# Altium PCB MAX232.PcbDoc
Units mm, origin at the board's own origin, x right, y up, seen from the top; angles counter-clockwise.
Board outline 20 x 20 mm, 2 copper layers (Top Layer, Bottom Layer); 9 components, 13 nets, 34 pads, 15 vias.
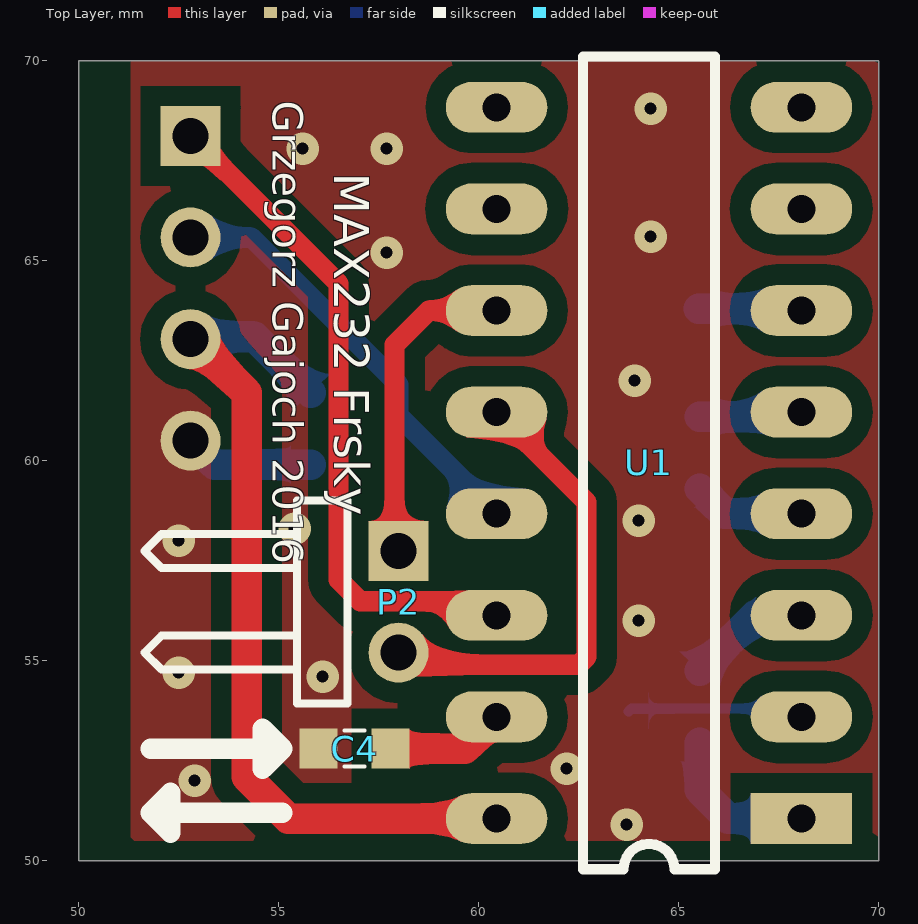
[diagram p0: Top Layer view]
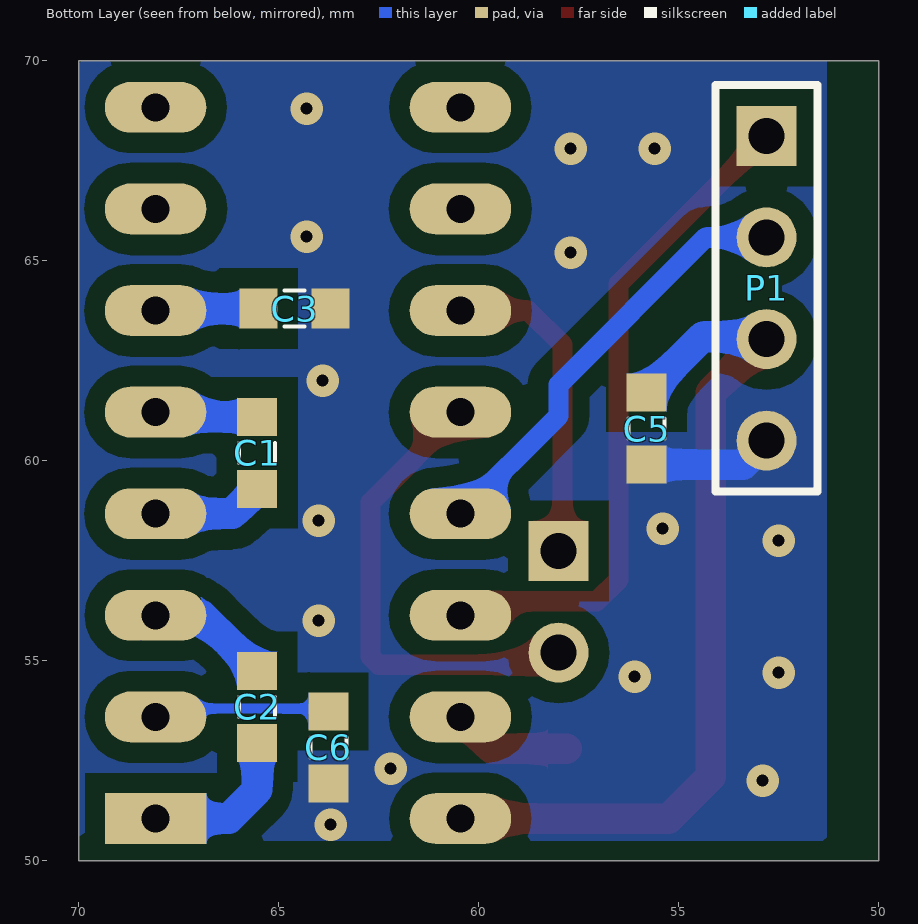
[diagram p1: Bottom Layer view, seen from below]
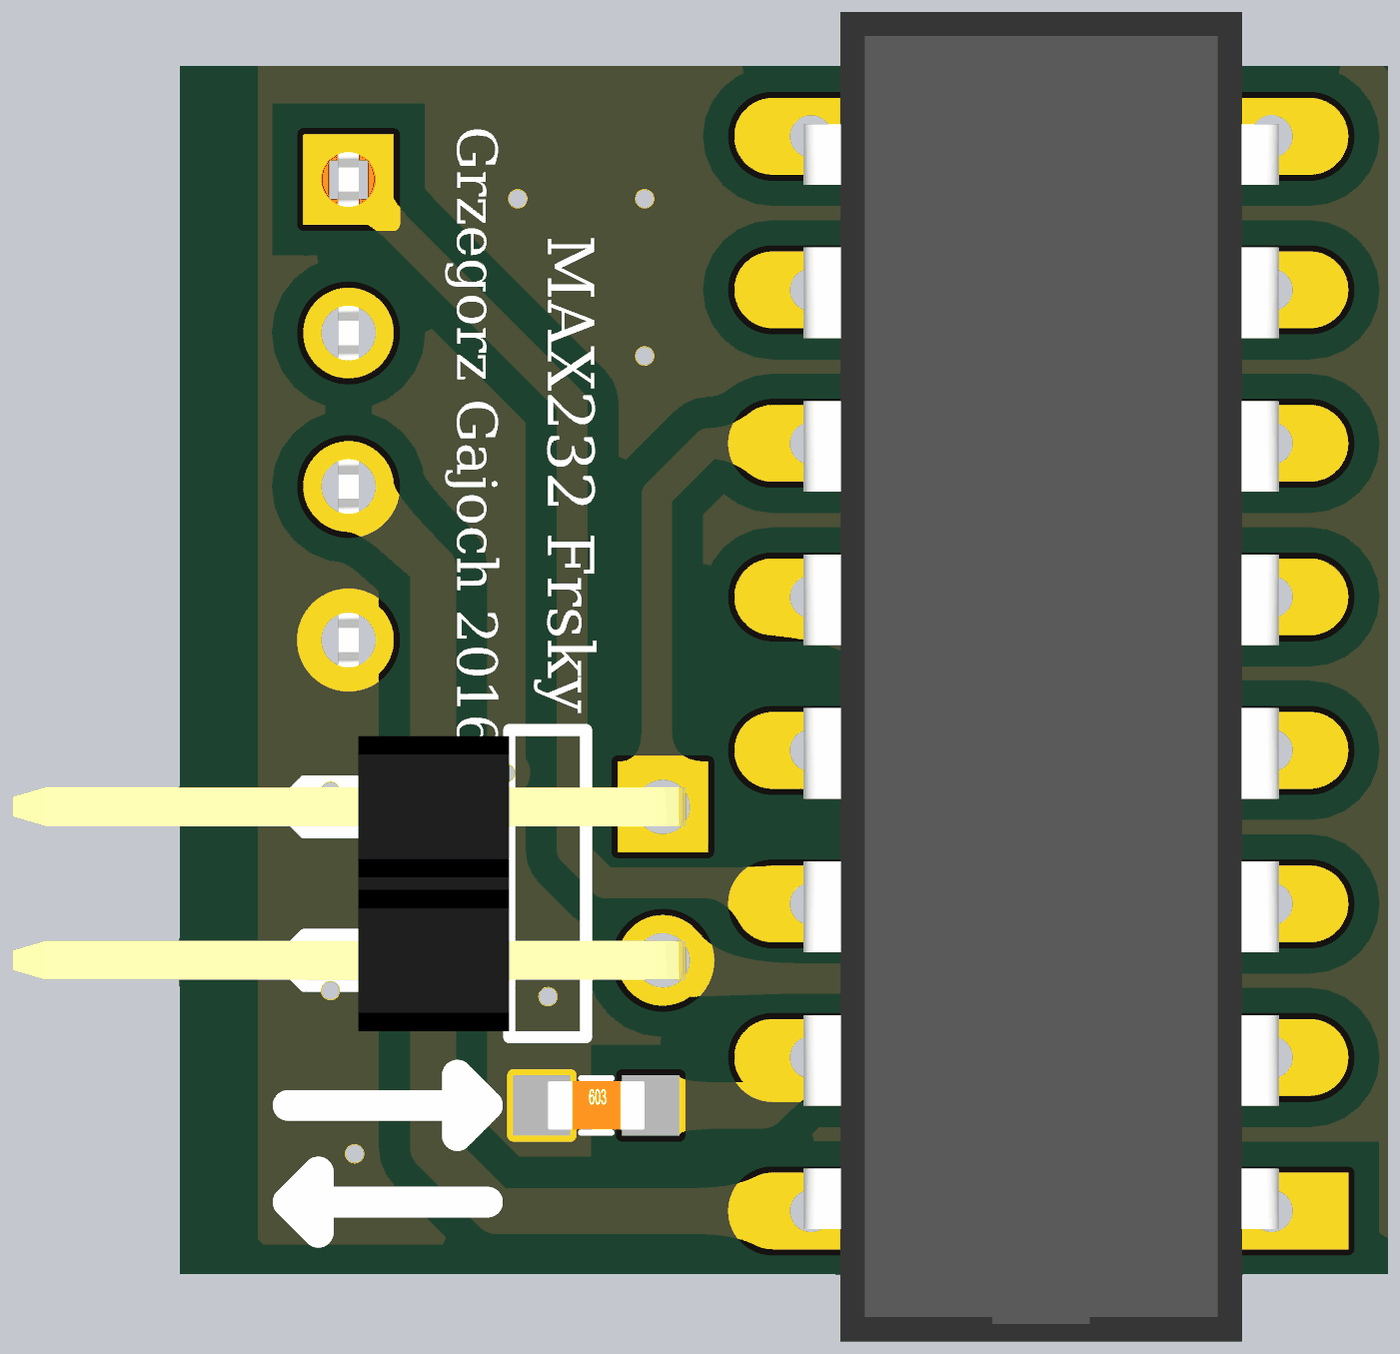
[diagram p2: 3D render of the assembled board from above, using the file's embedded part models]
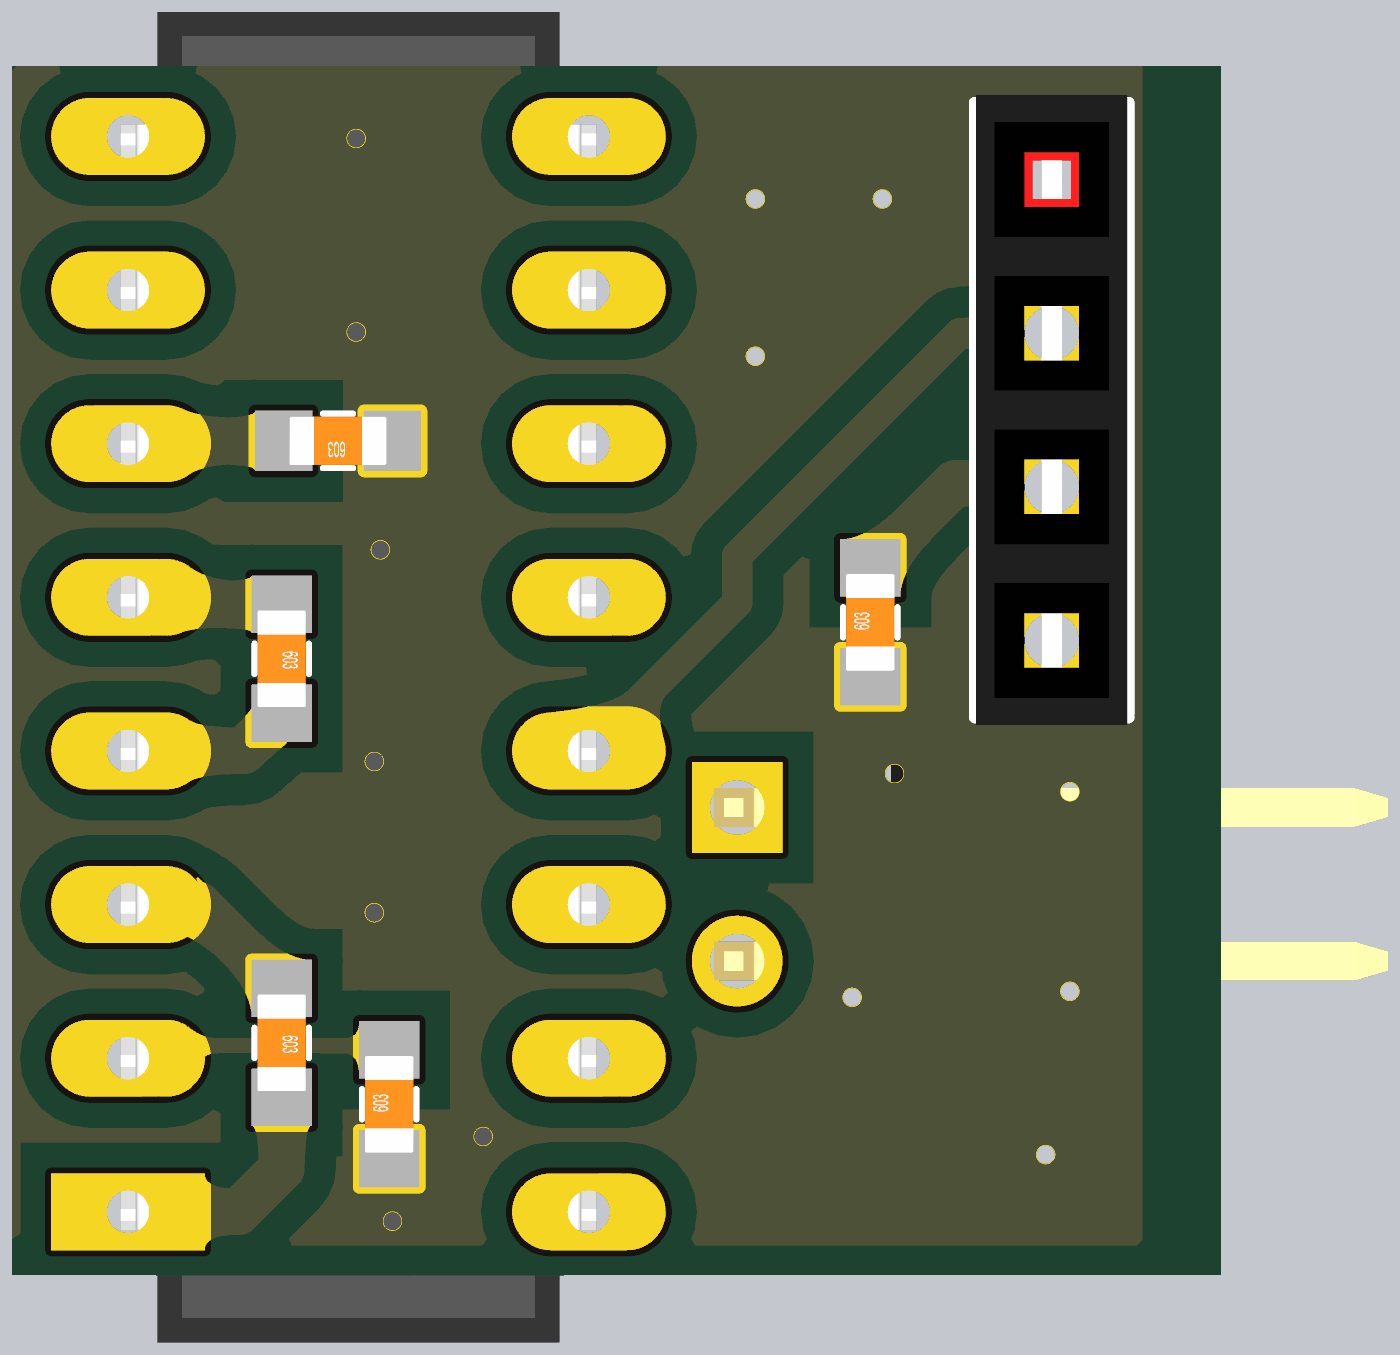
[diagram p3: 3D render of the assembled board from below, using the file's embedded part models]

## Layer stack, top to bottom
Top Solder: solder mask 0.0102, Solder Resist, Dk 3.5
Top Layer: signal copper 0.0356
Dielectric 1: dielectric 0.32, FR-4, Dk 4.8
Bottom Layer: signal copper 0.0356
Bottom Solder: solder mask 0.0102, Solder Resist, Dk 3.5

## Board outline
50,50 50,70 70,70 70,50

## Design rules (kind name [scope] priority, off if disabled: settings)
Clearance [All] p1: gap=0.254 except(0.508: Arc-Poly Track-Poly SMDPad-Poly THPad-Poly Via-Poly Fill-Poly Poly-Poly Poly-Region Poly-Text)
MinimumSolderMaskSliver [All] p1: minsoldermaskwidth=0.076
PolygonConnect [All] p1: connectstyle=Direct reliefconductorwidth=0.254 reliefentries=4 polygonreliefangle="90 Angle" airgapwidth=0.254
RoutingVias [All] p1: holewidth=0.711 width=1.27 viastyle="Through Hole" minholewidth=0.711 minwidth=1.27 maxholewidth=0.711 maxwidth=1.27
SilkToSolderMaskClearance [IsPad] p1: minsilkscreentomaskgap=0.025 clearancetoexposedcopper=TRUE
SolderMaskExpansion [All] p1: expansion=0.102
Width [All] p1: maxlimit=2.54 minlimit=0.254 preferedwidth=0.254 minimp=50.000000 maximp=50.000000 favimp=50.000000
28 further rules are at their usual default settings.

## Components (designator, comment, footprint, x,y, rotation, side; value= is the part's Value field where it differs from the comment)
C1 "C" C0603 65.532,60.198 r270 bottom
C2 "C" C0603 65.532,53.848 r270 bottom
C3 "C" C0603 64.6,63.8 r0 bottom
C4 "C" C0603 56.9,52.8 r0 top
C5 "C" C0603 55.8,60.8 r90 bottom
C6 "C" C0603 63.754,52.832 r90 bottom
P1 "Header 4" "HEADER 1X4 FEMALE" 52.8,68.12 r270 bottom
P2 "Header 2" "HEADER 1X2H Male" 58,57.74 r270 top
U1 "MAX232IN" DIP16 68.072,51.054 r180 top

## Footprints (in the part's own frame and the unit in brackets; to place one, negate y for a bottom-side part, rotate by r counter-clockwise, add the part's x,y. Pads: shape width x height; smd on the part's side, far side on the other; paste and mask are expansions set on the pad)
C0603 [mm] "SMD Capacitor, Inch 0603, Metric 1608."
  rect 0.95x1 smd: 1(-0.9,0) 2(0.9,0)
  silkscreen extent -0.25,-0.45 0.25,0.45, body extent -0.8,-0.4 0.8,0.4, height 0.3
DIP16 [mm]
  rect 2.54x1.27 hole 0.7: 1(0,0)
  oval 2.54x1.27 hole 0.7: 2(0,-2.54) 3(0,-5.08) 4(0,-7.62) 5(0,-10.16) 6(0,-12.7) 7(0,-15.24) 8(0,-17.78) 9(7.62,-17.78) 10(7.62,-15.24) 11(7.62,-12.7) 12(7.62,-10.16) 13(7.62,-7.62) 14(7.62,-5.08) 15(7.62,-2.54) 16(7.62,0)
  silkscreen extent 2.16,-19.05 5.46,1.27, body extent -0.13,-19.84 7.75,2.16, height 5.15
"HEADER 1X2H Male" [mm] "Connector; Header; 2 Position; Right Angle; Male"
  rect 1.5x1.5 hole 0.9: 1(0,0)
  round 1.5 hole 0.9: 2(2.54,0)
  silkscreen extent -1.27,-6.35 3.81,-1.27, body extent -1.17,-10.76 3.71,0.38, height 2.75
"HEADER 1X4 FEMALE" [mm] "Connector; Header; 4 Position; Female"
  rect 1.5x1.5 hole 0.9: 1(0,0)
  round 1.5 hole 0.9: 2(2.54,0) 3(5.08,0) 4(7.62,0)
  silkscreen extent -1.27,-1.27 8.89,1.27, body extent -1.39,-1.25 9.02,1.25, height 8.5

## Part data
C1 C2 C3 C4 C5 C6: library part Cap, "Generic capacitor"
P1: "Header, 4-Pin"
P2: "Header, 2-Pin"
U1: "Dual EIA-232 Driver / Receiver, -40 to 85 degC, 16-Pin PDIP (N), Pb-Free (RoHS)"

## Via types
v1: diameter 0.813, hole 0.3, Top Layer to Bottom Layer, tented both sides, 15 vias

## Nets (pads, with @x,y where several pads share a name; then routed paths per layer and width w, separated by ;. In a path a pad name is that pad's centre, name@x,y a point inside that pad or via, vN(x,y) a via of type N, cw(c..) or ccw(c..) an arc to the next point about the centre after c; other vN are vias at no path point)
5V: C5.2 P1.3 U1.16 | length 21.8
  Top Layer w0.762: P1.3 52.86,63.04 54.2,61.7 54.2,52.1 55.246,51.054 U1.16
  Bottom Layer w0.762: P1.3 52.86,63.1 54.4,63.1 C5.2
GND: C3.1 C4.1 C5.1 C6.1 P1.4 | length 3.2
  Bottom Layer w0.762: P1.4 53.4,59.9 C5.1
  other v1: 63.7,50.9 52.9,52 62.2,52.3 56.1,54.6 52.5,54.7 64,56 52.5,58 55.4,58.3 64,58.5 63.9,62 57.7,65.2 64.3,65.6 55.6,67.8 57.7,67.8 64.3,68.8
NetC1_1: C1.1 U1.5 | length 2.6
  Bottom Layer w0.762: C1.1 67.956,61.098 U1.5
NetC1_2: C1.2 U1.4 | length 2.8
  Bottom Layer w0.762: C1.2 66.156,58.674 U1.4
NetC2_1: C2.1 U1.3 | length 3.1
  Bottom Layer w0.762: C2.1 66.918,56.134 U1.3
NetC2_2: C2.2 U1.1 | length 4
  Bottom Layer w0.762: C2.2 65.532,51.768 66.246,51.054 U1.1
NetC3_2: C3.2 U1.6 | length 2.6
  Bottom Layer w0.762: C3.2 68.026,63.8 U1.6
NetC4_2: C4.2 U1.15 | length 3
  Top Layer w0.762: C4.2 59.658,52.8 U1.15
NetC6_2: C6.2 U1.2 | length 4.6
  Bottom Layer w0.254: C6.2 63.822,53.8 64.87,53.8 64.874,53.804 68.072,53.804 U1.2
NetP1_1: P1.1 U1.14 | length 17.2
  Top Layer w0.508: P1.1 56.5,64.42 56.5,57.022 57.04,56.482 60.452,56.482 U1.14
NetP1_2: P1.2 U1.13 | length 11
  Bottom Layer w0.508: P1.2 54.32,65.58 58,61.9 58,61.126 U1.13
NetP2_1: P2.1 U1.11 | length 8.3
  Top Layer w0.508: P2.1@58.166,57.658 57.9,57.924 57.9,62.9 58.754,63.754 U1.11
NetP2_2: P2.2 U1.12 | length 11.8
  Top Layer w0.508: P2.2@58.166,55.118 58.384,54.9 62.5,54.9 62.7,55.1 62.7,58.966 U1.12
pads on no net: U1.7 U1.8 U1.9 U1.10

## Polygon pours and split planes (outlines as drawn)
GND on Bottom Layer "GND_L02_P000" (solid, remove dead copper, pour order 0): 51.3,50.5 51.3,70 70,70 70,50.5
GND on Top Layer "GND_L01_P002" (solid, remove dead copper, pour order 2): 51.3,50.5 51.3,70 70,70 70,50.5

## Silkscreen, mask and mechanical layers (free items; w line width, h text height)
Top Overlay:
  lines w0.508: 51.8,52.8 55.1,52.8 ; 55.1,51.2 51.8,51.2 ; 51.8,51.2 52.3,51.7 52.3,50.7 51.8,51.2 ; 55.1,52.8 54.6,53.3 54.6,52.3 55.1,52.8
  text "Grzegorz Gajoch 2016" at 54.6,69 h1.3 r270
  text "MAX232 Frsky" at 56.1,67.2 h1.5 r270
Mechanical 1:
  lines w0.127: 50,70 70,70 70,50